# Altium PCB DFB.PcbDoc
Units mm, origin at the board's own origin, x right, y up, seen from the top; angles counter-clockwise.
Board outline 72.04 x 102.48 mm, 2 copper layers (Top Layer, Bottom Layer); 45 components, 51 nets, 237 pads, 4 vias.
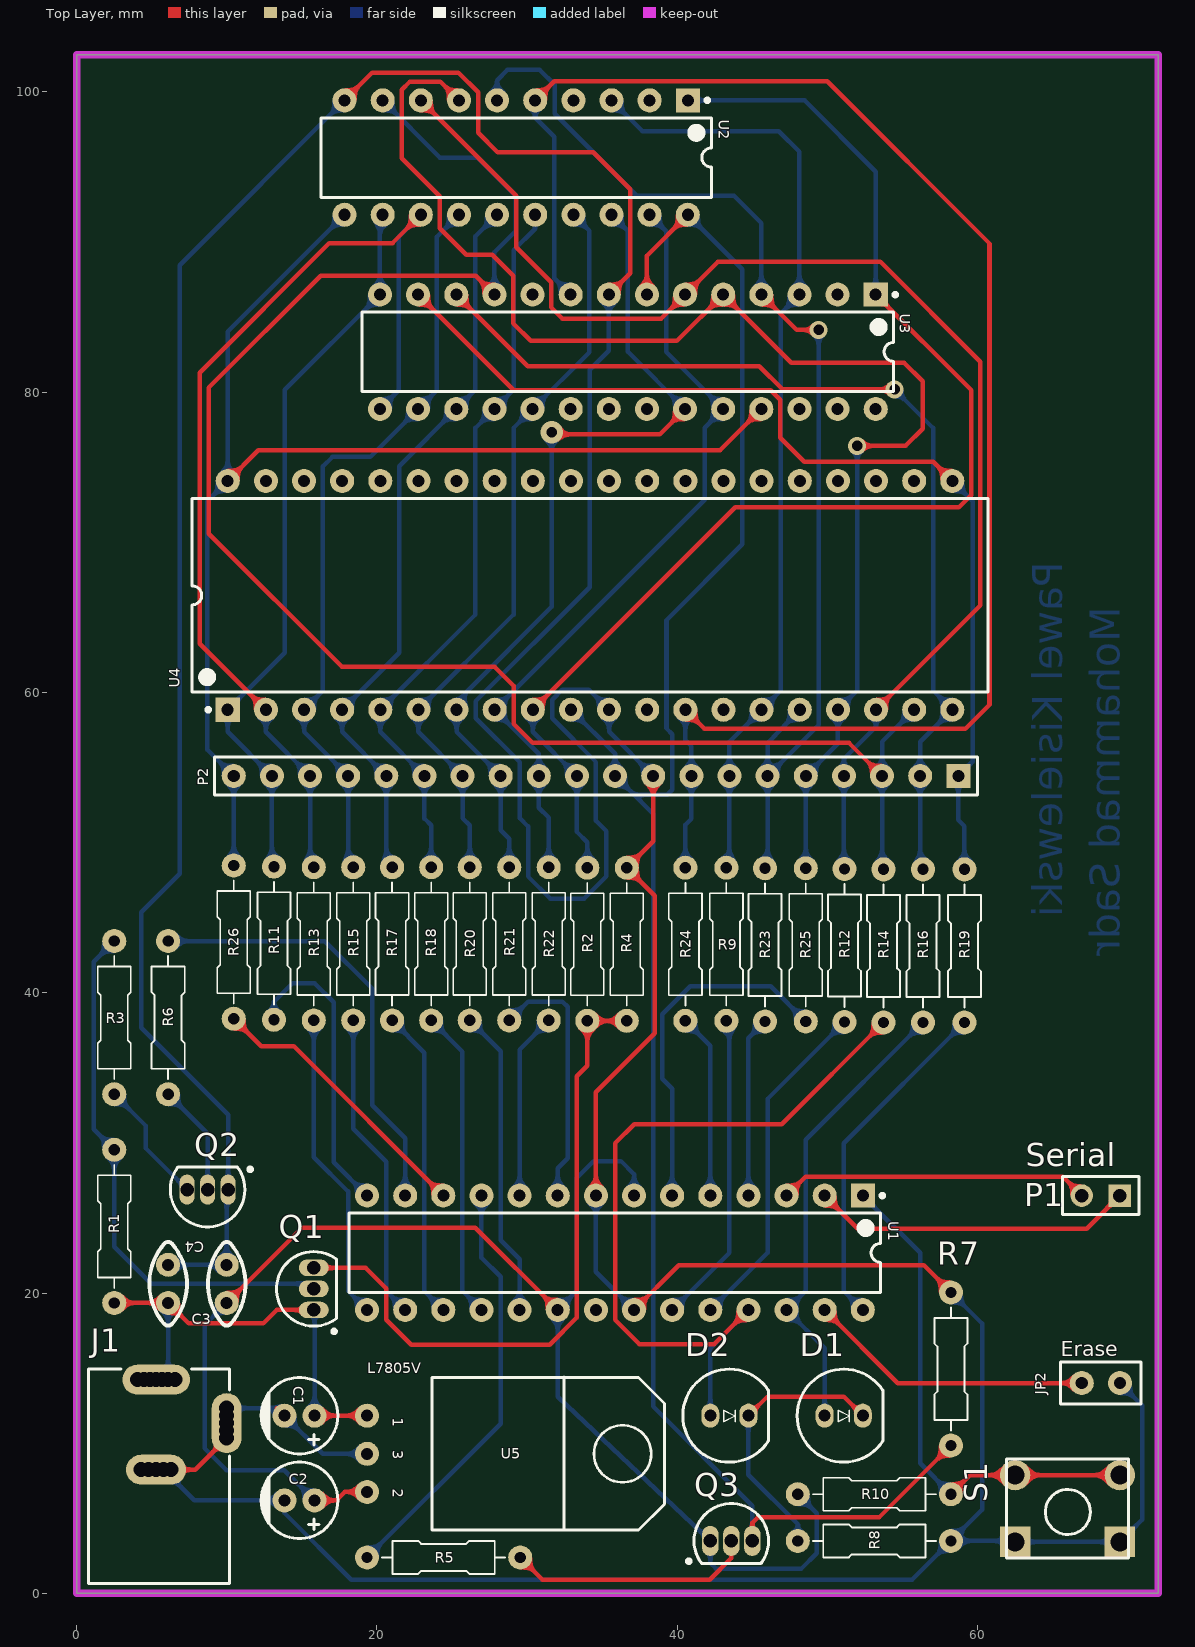
[diagram p0: Top Layer view]
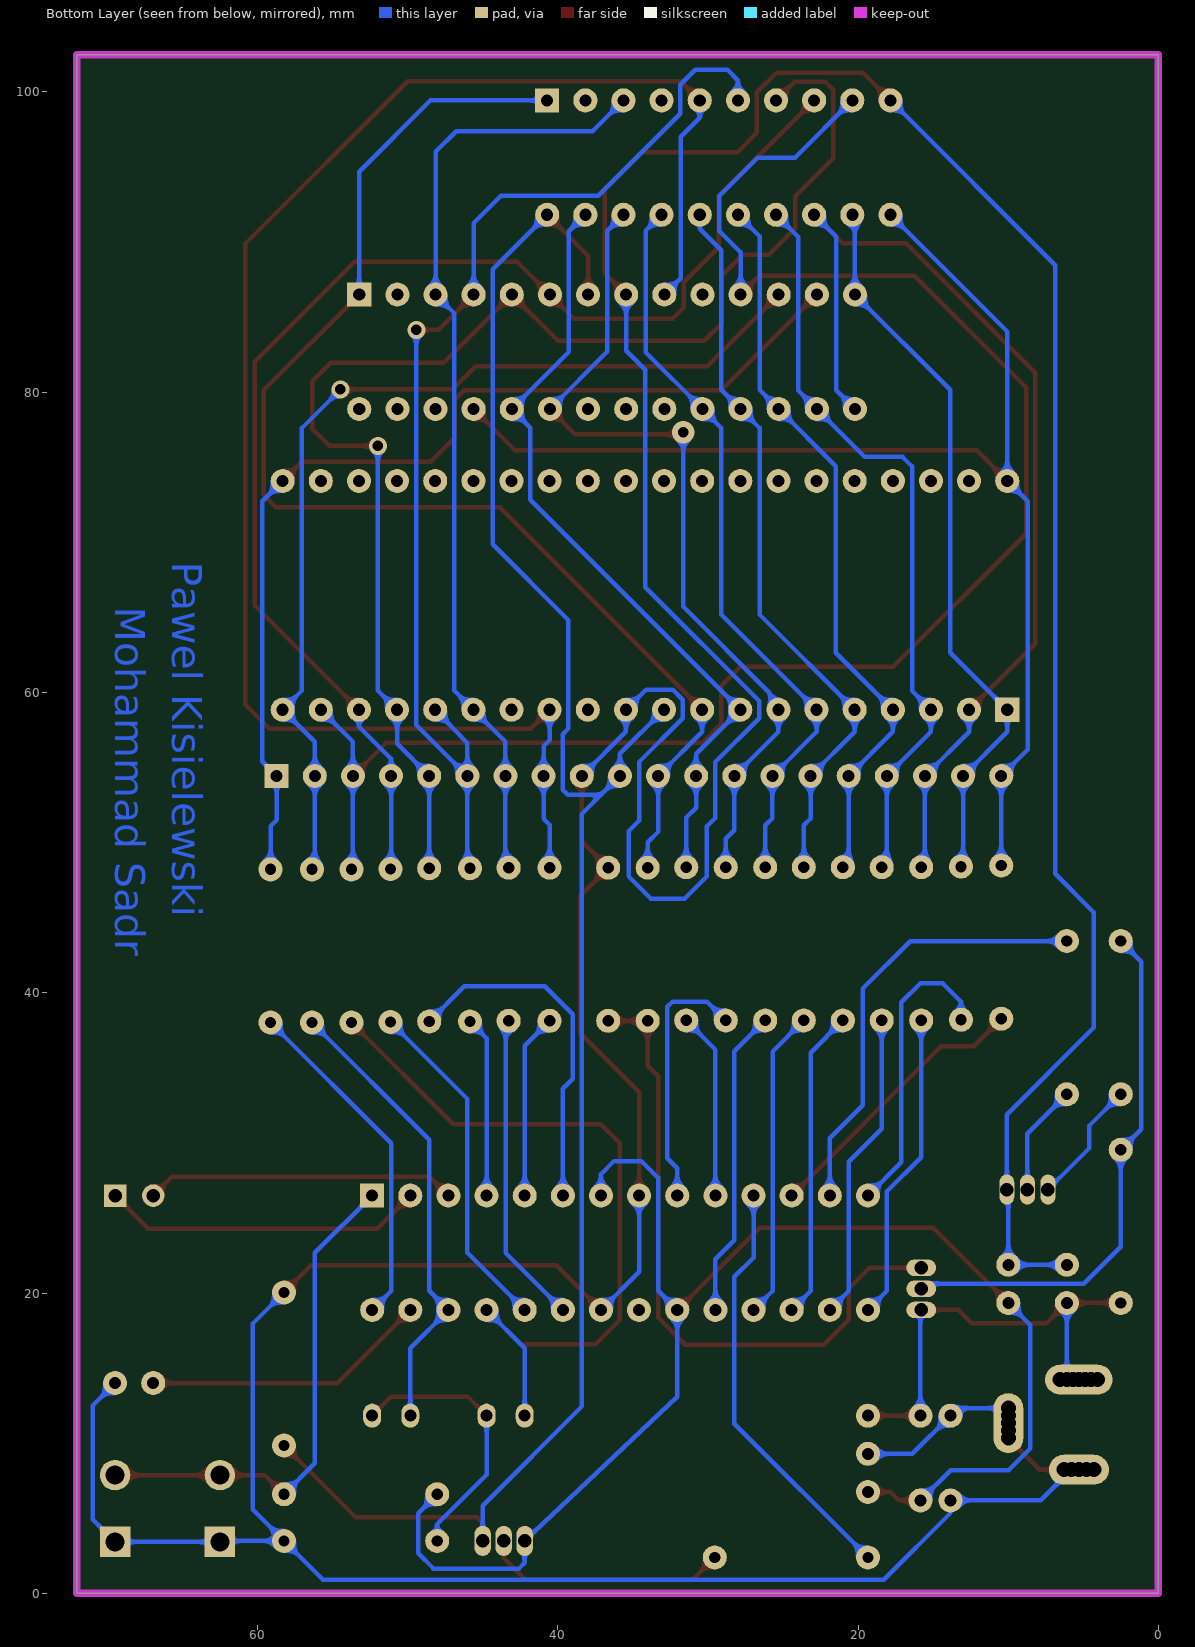
[diagram p1: Bottom Layer view, seen from below]
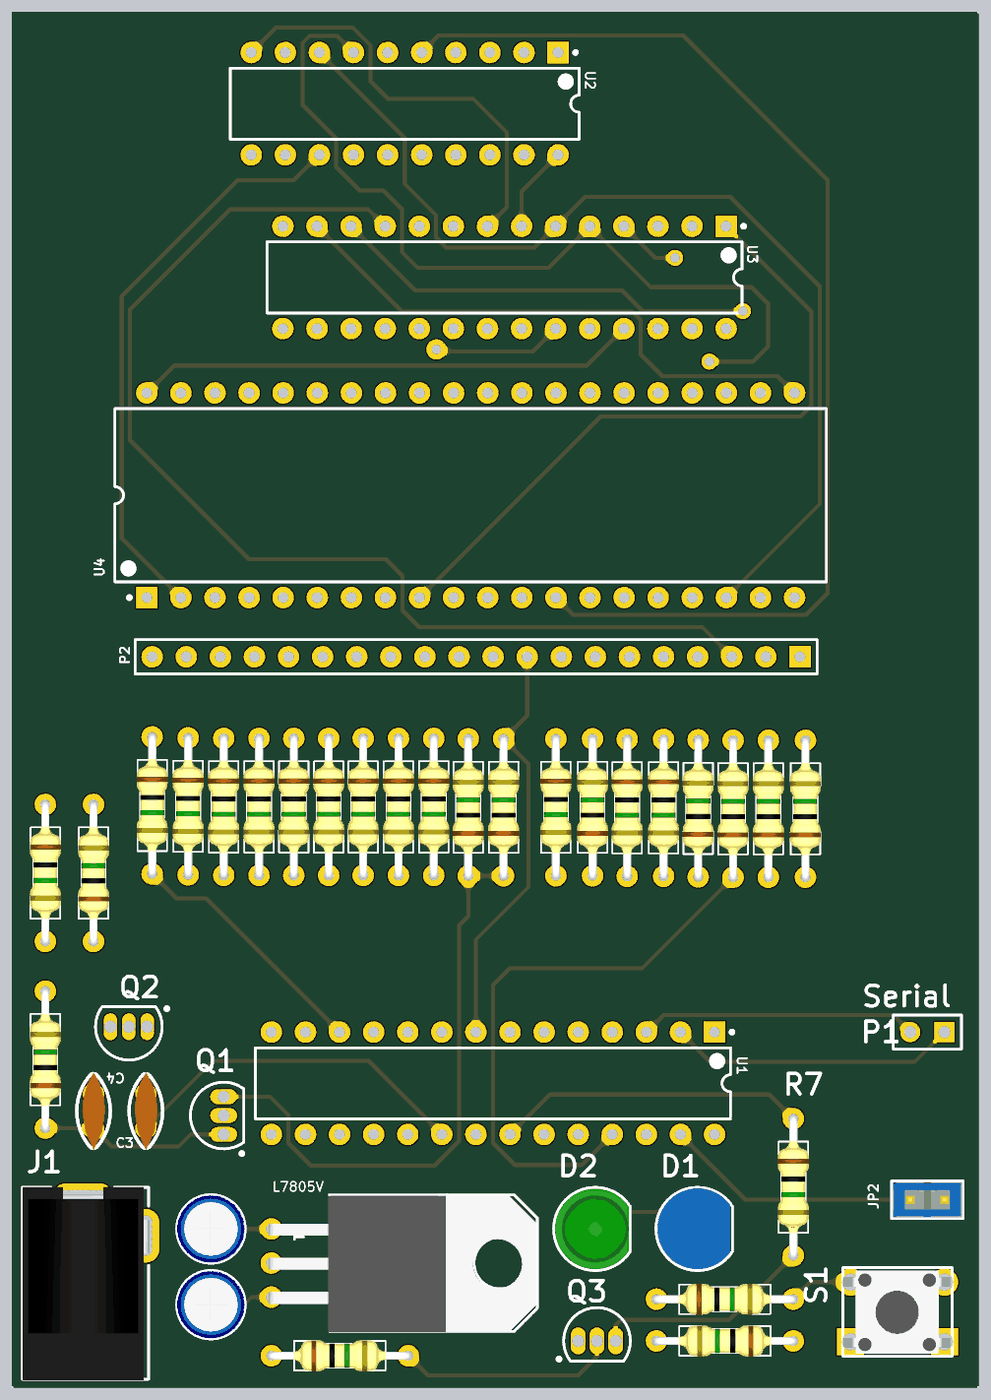
[diagram p2: 3D render of the assembled board from above, using the file's embedded part models]

## Layer stack, top to bottom
Top Solder: solder mask 0.0102, Solder Resist, Dk 3.5
Top Layer: signal copper 0.0356
Dielectric 1: dielectric 0.32, FR-4, Dk 4.8
Bottom Layer: signal copper 0.0356
Bottom Solder: solder mask 0.0102, Solder Resist, Dk 3.5

## Board outline
0,0 0,102.48 72.04,102.48 72.04,0

## Design rules (kind name [scope] priority, off if disabled: settings)
Clearance [All] p1: gap=0.3 ignorepadtopadclearanceinfootprint=FALSE
HoleSize [All] p1: absolutevalues=TRUE maxlimit=5 minlimit=0.2 maxpercent=80.000 minpercent=20.000
HoleToHoleClearance [All] p1: gap=0.3 allowstackedmicrovias=TRUE
MinimumSolderMaskSliver [All] p1: minsoldermaskwidth=0.3
PolygonConnect [All] p1: connectstyle=Relief reliefconductorwidth=0.254 reliefentries=4 polygonreliefangle="90 Angle" airgapwidth=0.254
RoutingCorners [All] p1: cornerstyle=Round minsetback=2.54 maxsetback=2.54
RoutingVias [All] p1: holewidth=0.7 width=1.2 viastyle="Through Hole" minholewidth=0.7 minwidth=1.5 maxholewidth=1 maxwidth=1.7
SilkToSilkClearance [All] p1: silktosilkclearance=0
SilkToSolderMaskClearance [IsPad] p1: minsilkscreentomaskgap=0 clearancetoexposedcopper=TRUE
SolderMaskExpansion [All] p1: expansion=0.102
Width [All] p1: maxlimit=0.4 minlimit=0.3 preferedwidth=0.3
24 further rules are at their usual default settings.

## Components (designator, comment, footprint, x,y, rotation, side; value= is the part's Value field where it differs from the comment)
C1 "100uF" "cap 01" 14.84,11.83 r0 top
C2 "10uF" "cap 01" 14.84,6.19 r0 top
C3 "100nF" "Cap - 100nF" 6.09,20.61 r90 top
C4 "10nF" "Cap - 100nF" 9.99,20.61 r90 top
D1 "LED 5MM" LED5MM_BLUE 51.09,11.83 r0 top
D2 "LED 5MM" LED5MM_GRN 43.47,11.83 r0 top
J1 "DC Power Jack" "DC Power Jack 1" 4.49,14.23 r90 top
JP2 "Erase" "Jumper Small - 2.54 - BLUE" 68.212,14 r0 top
P1 "Serial" HDR1X2 69.482,26.49 r180 top
P2 "Header 20" HDR1X20 58.72,54.44 r180 top
Q1 "BC557" TO-92A#1 15.79,20.278 r0 top
Q2 "BC547" TO-92A#2 8.72,26.89 r90 top
Q3 "BC557" TO-92A#3 43.6,3.49 r270 top
R1 "10K" "Axial 0_25 W, 0_4 IN LEAD PITCH" 2.5,24.44 r90 top
R2 "100" "Axial 0_25 W, 0_4 IN LEAD PITCH" 34.01,43.23 r90 top
R3 "1K" "Axial 0_25 W, 0_4 IN LEAD PITCH" 2.5,38.34 r270 top
R4 "1K" "Axial 0_25 W, 0_4 IN LEAD PITCH" 36.64,43.23 r90 top
R5 "4.7K" "Axial 0_25 W, 0_4 IN LEAD PITCH" 24.44,2.39 r0 top
R6 "4.7K" "Axial 0_25 W, 0_4 IN LEAD PITCH" 6.09,38.34 r90 top
R7 "100" "Axial 0_25 W, 0_4 IN LEAD PITCH" 58.23,14.94 r270 top
R8 "100" "Axial 0_25 W, 0_4 IN LEAD PITCH" 53.13,3.49 r180 top
R9 "1K" "Axial 0_25 W, 0_4 IN LEAD PITCH" 43.27,43.23 r90 top
R10 "10K" "Axial 0_25 W, 0_4 IN LEAD PITCH" 53.13,6.6 r0 top
R11 "1K" "Axial 0_25 W, 0_4 IN LEAD PITCH" 13.14,43.3 r270 top
R12 "1K" "Axial 0_25 W, 0_4 IN LEAD PITCH" 51.14,43.15 r90 top
R13 "1K" "Axial 0_25 W, 0_4 IN LEAD PITCH" 15.79,43.26 r270 top
R14 "1K" "Axial 0_25 W, 0_4 IN LEAD PITCH" 53.74,43.12 r90 top
R15 "1K" "Axial 0_25 W, 0_4 IN LEAD PITCH" 18.42,43.26 r270 top
R16 "1K" "Axial 0_25 W, 0_4 IN LEAD PITCH" 56.37,43.12 r90 top
R17 "1K" "Axial 0_25 W, 0_4 IN LEAD PITCH" 21.01,43.26 r270 top
R18 "1K" "Axial 0_25 W, 0_4 IN LEAD PITCH" 23.61,43.26 r270 top
R19 "1K" "Axial 0_25 W, 0_4 IN LEAD PITCH" 59.13,43.12 r90 top
R20 "1K" "Axial 0_25 W, 0_4 IN LEAD PITCH" 26.18,43.26 r270 top
R21 "1K" "Axial 0_25 W, 0_4 IN LEAD PITCH" 28.81,43.26 r270 top
R22 "1K" "Axial 0_25 W, 0_4 IN LEAD PITCH" 31.44,43.26 r270 top
R23 "1K" "Axial 0_25 W, 0_4 IN LEAD PITCH" 45.85,43.19 r270 top
R24 "1K" "Axial 0_25 W, 0_4 IN LEAD PITCH" 40.54,43.23 r270 top
R25 "1K" "Axial 0_25 W, 0_4 IN LEAD PITCH" 48.56,43.19 r270 top
R26 "1K" "Axial 0_25 W, 0_4 IN LEAD PITCH" 10.46,43.37 r270 top
S1 "Switch PB" "Switch - Push to On" 65.99,5.65 r180 top
U1 "ATmega8A-PU" 28P3 35.85,22.68 r270 top
U2 "20 Pins / AT90S2313/Tiny2313" 20P3 29.271,95.63 r270 top
U3 "28 Pins /Mega8/88/168..." 28P3 36.711,82.69 r270 top
U4 "40 Pins / Mega16/32/644/128..." 40P6 34.19,66.47 r90 top
U5 "L7805V" "78XXCV - Right" 19.34,9.29 r270 top

## Footprints (in the part's own frame and the unit in brackets; to place one, negate y for a bottom-side part, rotate by r counter-clockwise, add the part's x,y. Pads: shape width x height; smd on the part's side, far side on the other; paste and mask are expansions set on the pad)
20P3 [mm] "DIP, 20-Pin, Row Spacing 7.62 mm, Pitch 2.54 mm"
  rect 1.6x1.6 hole 0.8: 1(-3.81,11.43)
  round 1.6 hole 0.8: 2(-3.81,8.89) 3(-3.81,6.35) 4(-3.81,3.81) 5(-3.81,1.27) 6(-3.81,-1.27) 7(-3.81,-3.81) 8(-3.81,-6.35) 9(-3.81,-8.89) 10(-3.81,-11.43) 11(3.81,-11.43) 12(3.81,-8.89) 13(3.81,-6.35) 14(3.81,-3.81) 15(3.81,-1.27) 16(3.81,1.27) 17(3.81,3.81) 18(3.81,6.35) 19(3.81,8.89) 20(3.81,11.43)
  silkscreen extent -3.93,-13 2.65,13, body extent -3.6,-12.95 3.6,12.95, height 5.34
28P3 [mm] "DIP, 28-Leads, Row Spacing 7.62mm, Pitch 2.54mm, Body 34.67x7.3mm"
  rect 1.6x1.6 hole 0.8: 1(-3.81,16.51)
  round 1.6 hole 0.8: 2(-3.81,13.97) 3(-3.81,11.43) 4(-3.81,8.89) 5(-3.81,6.35) 6(-3.81,3.81) 7(-3.81,1.27) 8(-3.81,-1.27) 9(-3.81,-3.81) 10(-3.81,-6.35) 11(-3.81,-8.89) 12(-3.81,-11.43) 13(-3.81,-13.97) 14(-3.81,-16.51) 15(3.81,-16.51) 16(3.81,-13.97) 17(3.81,-11.43) 18(3.81,-8.89) 19(3.81,-6.35) 20(3.81,-3.81) 21(3.81,-1.27) 22(3.81,1.27) 23(3.81,3.81) 24(3.81,6.35) 25(3.81,8.89) 26(3.81,11.43) 27(3.81,13.97) 28(3.81,16.51)
  silkscreen extent -3.93,-17.7 2.65,17.94, body extent -3.6,-17.65 3.6,17.65, height 4.58
40P6 [mm] "40-Pin Ceramic Dual In-Line Package (CerDIP)"
  rect 1.6x1.6 hole 0.8: 1(-7.62,24.13)
  round 1.6 hole 0.8: 2(-7.62,21.59) 3(-7.62,19.05) 4(-7.62,16.51) 5(-7.62,13.97) 6(-7.62,11.43) 7(-7.62,8.89) 8(-7.62,6.35) 9(-7.62,3.81) 10(-7.62,1.27) 11(-7.62,-1.27) 12(-7.62,-3.81) 13(-7.62,-6.35) 14(-7.62,-8.89) 15(-7.62,-11.43) 16(-7.62,-13.97) 17(-7.62,-16.51) 18(-7.62,-19.05) 19(-7.62,-21.59) 20(-7.62,-24.13) 21(7.62,-24.13) 22(7.62,-21.59) 23(7.62,-19.05) 24(7.62,-16.51) 25(7.62,-13.97) 26(7.62,-11.43) 27(7.62,-8.89) 28(7.62,-6.35) 29(7.62,-3.81) 30(7.62,-1.27) 31(7.62,1.27) 32(7.62,3.81) 33(7.62,6.35) 34(7.62,8.89) 35(7.62,11.43) 36(7.62,13.97) 37(7.62,16.51) 38(7.62,19.05) 39(7.62,21.59) 40(7.62,24.13)
  silkscreen extent -7.74,-26.5 6.45,26.5, body extent -7.05,-26.47 7.05,26.47, height 4.83
"78XXCV - Right" [mm] "Right Angle"
  round 1.6 hole 0.8: 1(-2.54,0) 2(2.54,0) 3(0,0)
  silkscreen extent -5.11,4.32 5.08,19.81, body extent -5.03,-0.2 5.13,19.71, height 4.44
"Axial 0_25 W, 0_4 IN LEAD PITCH" [mm] "Designer Abbas Basereh"
  round 1.6 hole 0.75: 1(5.1,0) 2(-5.1,0)
  silkscreen extent -4.1,-1.1 4.1,1.1, body extent -5.4,-1.16 5.36,1.16, height 3.63
"cap 01" [mm]
  round 1.6 hole 0.8: 1(1,0) 2(-1,0)
  silkscreen extent -2.55,-2.55 2.55,2.55, body extent -2.53,-2.53 2.53,2.53, height 12.54
"Cap - 100nF" [mm]
  round 1.6 hole 0.8: 1(-1.27,0) 2(1.27,0)
  silkscreen extent -2.78,-1.25 2.79,1.25, body extent -2.92,-0.86 2.92,0.83, height 6.92
"DC Power Jack 1" [mm] "Power Adaptor Jack"
  round 1.5 hole 1: 1(0,0.45) 1(0,0) 1(0,-0.4) 1(0,-1.2) 1(0,-1.6) 1(0,-2.05) 2(-6,-1.8) 2(-6,-1.3) 2(-6,-0.3) 2(-6,0.2) 3(-3.9,-5.5) 3(-3.4,-5.5) 3(-2.4,-5.5) 3(-1.9,-5.5)
  oval 2x4.5 hole 1: 1(0,-0.8)
  oval 2x4 hole 1: 2(-6,-0.8)
  oval 4x2 hole 1: 3(-2.9,-5.5)
  silkscreen extent -13.59,-5.7 0.7,3.7, body extent -13.68,-5.74 0.72,3.66, height 11.05
HDR1X2 [mm] "Connector; Header; 2 Position"
  rect 1.5x1.5 hole 0.9: 1(0,0)
  round 1.5 hole 0.9: 2(2.54,0)
  silkscreen extent -1.27,-1.27 3.81,1.27
HDR1X20 [mm] "Connector; Header; 20 Position"
  rect 1.6x1.6 hole 0.8: 1(0,0)
  round 1.6 hole 0.8: 2(2.54,0) 3(5.08,0) 4(7.62,0) 5(10.16,0) 6(12.7,0) 7(15.24,0) 8(17.78,0) 9(20.32,0) 10(22.86,0) 11(25.4,0) 12(27.94,0) 13(30.48,0) 14(33.02,0) 15(35.56,0) 16(38.1,0) 17(40.64,0) 18(43.18,0) 19(45.72,0) 20(48.26,0)
  silkscreen extent -1.27,-1.27 49.53,1.27
"Jumper Small - 2.54 - BLUE" [mm]
  round 1.6 hole 0.8: 1(-1.27,0) 2(1.27,0)
  silkscreen extent -2.67,-1.4 2.67,1.4, body extent -2.54,-1.27 2.54,1.27, height 8.57
LED5MM_BLUE [mm] "LED 5MM THROUGH HOLE BLUE-Designer Abbas Basereh"
  oval 1.2x1.6 hole 0.8: 1(-1.27,0) 2(1.27,0)
  silkscreen extent -3.1,-3.1 2.6,3.1, body extent -2.99,-2.98 2.43,3.04, height 12.31
LED5MM_GRN [mm] "LED 5MM THROUGH HOLE GREEN-Designer Abbas Basereh"
  oval 1.2x1.6 hole 0.8: 1(-1.27,0) 2(1.27,0)
  silkscreen extent -3.1,-3.1 2.6,3.1, body extent -3,-3 2.5,3, height 9.14
"Switch - Push to On" [mil]
  rect 80x80 hole 50: 1(-137.5,87.5) 1(137.5,87.5)
  round 80 hole 50: 2(-137.5,-87.5) 2(137.5,-87.5)
  silkscreen extent -160,-130 160,130, body extent -155,-121 157,123, height 205
TO-92A#1 [mm] "TO, Flat Index; 3 In-Line, Axial Leads; Body Dia. 4.5mm; Leads 0.51 x 0.48 mm (max)"
  oval 2x1.1 hole 0.9: 1(0,-1.408) 2(0,0) 3(0,1.402)
  silkscreen extent -2.48,-2.95 1.5,2.48, body extent -2.48,-2.5 1.5,2.5, height 6.86
TO-92A#2 [mm] "TO, Flat Index; 3 In-Line, Axial Leads; Body Dia. 4.5mm; Leads 0.51 x 0.48 mm (max)"
  oval 2x1 hole 0.9: 1(0,-1.37) 2(0,0) 3(0,1.37)
  silkscreen extent -2.48,-2.96 1.5,2.48, body extent -2.48,-2.5 1.5,2.5, height 6.86
TO-92A#3 [mm] "TO, Flat Index; 3 In-Line, Axial Leads; Body Dia. 4.5mm; Leads 0.51 x 0.48 mm (max)"
  oval 2x1.1 hole 0.9: 1(0,-1.4) 2(0,0) 3(0,1.4)
  silkscreen extent -2.48,-2.95 1.5,2.48, body extent -2.48,-2.5 1.5,2.5, height 6.86

## Part data
C1 C2: library part Cap-Polar, "Polar Capacitor", Voltage=16V, Adding Date=1387/12/20, Designer="Saeid Jorablo", Organazation=ControTec
C3 C4: library part Cap-Bipolar, "Bipolar Capacitor", Voltage=100V, Adding Date=1387/12/20, Designer="Saeid Jorablo", Organazation=ControTec
D1 D2: "Light Emitting Diode", Data=16-12-2016, Designer="Abbas Basereh"
J1: "DC Power Jack. Center Pin 2.5mm. Diameter: 5.7mm", Adding Date=10/21/2009, Company=Personal, Designer="Ali Hafizi", Project Name=Laser
JP2: library part Jumper, "Jumper", Company=E.P.I.L, Defualt State=Close, Design Date=2011/11/02
P1: library part "Header 2", "Header, 2-Pin", LatestRevisionDate=17-Jul-2002, LatestRevisionNote="Re-released for DXP Platform.", Publisher="Altium Limited"
P2: "Header, 20-Pin", LatestRevisionDate=17-Jul-2002, LatestRevisionNote="Re-released for DXP Platform.", Publisher="Altium Limited"
Q1 Q3: library part 2N3906, "PNP General Purpose Amplifier", ComponentLink1Description="Manufacturer Link", ComponentLink1URL=http://www.fairchildsemi.com/, ComponentLink2Description=Datasheet, ComponentLink2URL=http://www.fairchildsemi.com/ds/2N%2F2N3906.pdf, DatasheetVersion=1997, LatestRevisionDate=15-Jan-2003, LatestRevisionNote="PCB Footprint 'BCY-W3/D4.7' replaced", PackageDescription="TO, Flat Index; 3 In-Line, Axial Leads; Body Dia. 4.5mm; Leads 0.51 x 0.48 mm (max)", PackageReference=TO-92A, PackageVersion=Sep-1998, Published=8-Jun-2000, Publisher="Altium Limited"
Q2: library part 2N3904, "NPN General Purpose Amplifier", ComponentLink1Description="Manufacturer Link", ComponentLink1URL=http://www.fairchildsemi.com/, ComponentLink2Description=Datasheet, ComponentLink2URL=http://www.fairchildsemi.com/ds/2N%2F2N3904.pdf, DatasheetVersion=1997, LatestRevisionDate=15-Jan-2003, LatestRevisionNote="PCB Footprint 'BCY-W3/D4.7' replaced", PackageDescription="TO, Flat Index; 3 In-Line, Axial Leads; Body Dia. 4.5mm; Leads 0.51 x 0.48 mm (max)", PackageReference=TO-92A, PackageVersion=Sep-1998, Published=8-Jun-2000, Publisher="Altium Limited"
R1 R2 R3 R4 R5 R6 R7 R8 R9 R10 R11 R12 R13 R14 R15 R16 R17 R18 R19 R20 R21 R22 R23 R24 R25 R26: library part "RES Axial 0.25W", "RES Axial 0.25W", Data=4-1-2017, Desc.="RES Axial 0.25W", Designer="Abbas Basereh"
S1: "Push Button Switch"
U1: "8-bit AVR Microcontroller, 8KB Flash, 512 Bytes EEPROM, 1KB SRAM, 28-pin PDIP, Industrial Grade (-40°C to 85°C)", Supplier Part Number 1=ATMEGA8A-PU-ND, ComponentLink1Description="Manufacturer Link", ComponentLink1URL=http://www.atmel.com/products/avr/default.asp?, ComponentLink2Description="ATmega8A Datasheet", ComponentLink2URL=http://www.atmel.com/dyn/resources/prod_documents/doc8159.pdf, ComponentLink3Description="ATmega8A Summary", ComponentLink3URL=http://www.atmel.com/dyn/resources/prod_documents/8159S.pdf, ComponentLink4Description="Atmel.com Home", ComponentLink4URL=http://www.atmel.com, DatasheetVersion="revC, Jul-2009", PackageDescription="28-lead (0.300\"/7.62mm Wide) Plastic Dual Inline Package (PDIP)", PackageReference=28P3, PackageVersion="revB, Sep-2001", Published=1-Apr-2010, Publisher="Altium Limited", Supplier 1=Digi-Key, Supplier 2=Farnell, Supplier 3=Mouser, Supplier Part Number 2=1748534, Supplier Part Number 3=556-ATMEGA8A-PU
U2: library part ATtiny2313-20PI, "Low Power tinyAVR® 8-Bit Microcontroller, 2K Flash Memory, 20MHz, Industrial Temperature, 20-Lead PDIP", Code_JEDEC=MS-001-AD, ComponentLink1Description="Manufacturer URL", ComponentLink1URL=http://www.atmel.com/, DatasheetVersion="DOC2543B, Mar-2009", PackageDescription="20-lead (0.300\"/7.62mm Wide) Plastic Dual Inline Package (PDIP)", PackageReference=20P3, PackageVersion="revD, Oct-2010"
U3: library part ATmega8A-PU, "8-bit AVR Microcontroller, 2.7-5.5V, 16MHz, 8KB Flash, 512 Bytes EEPROM, 1KB SRAM, 28-pin PDIP, Industrial Grade (-40°C to 85°C)", ComponentLink1Description="Manufacturer URL", ComponentLink1URL=http://www.atmel.com/, ComponentLink2Description="ATmega8A Datasheet", ComponentLink2URL=http://www.atmel.com/dyn/resources/prod_documents/doc8159.pdf, ComponentLink3Description="ATmega8A Summary", ComponentLink3URL=http://www.atmel.com/dyn/resources/prod_documents/8159S.pdf, DatasheetVersion="revD, Feb-2011", PackageDescription="28-lead (0.300\"/7.62mm Wide) Plastic Dual Inline Package (PDIP)", PackageReference=28P3, PackageVersion="revB, Sep-2001"
U4: library part ATmega32A-PU, "8-bit AVR Microcontroller, 2.7-5.5V, 16MHz, 32KB Flash, 1KB EEPROM, 2KB SRAM, 40-pin PDIP, Industrial Grade (-40°C to 85°C)", Code_JEDEC=MS-011-AC, ComponentLink1Description="Manufacturer URL", ComponentLink1URL=http://www.atmel.com/, ComponentLink2Description="ATmega32A Datasheet", ComponentLink2URL=http://www.atmel.com/dyn/resources/prod_documents/doc8155.pdf, ComponentLink3Description="ATmega32A Summary", ComponentLink3URL=http://www.atmel.com/dyn/resources/prod_documents/8155S.pdf, DatasheetVersion="revC, Feb-2011", PackageDescription="40-lead (0.600\"/15.24mm Wide) Plastic Dual Inline Package (PDIP)", PackageReference=40P6, PackageVersion="revB, Sep-2001"
U5: library part L78XXCV, "Fixed Voltage Regulator", Adding Date=1387/01/06, Company=ControTec, Designer="Saeid Jorablo"

## Via types
v1: diameter 1.2, hole 0.7, Top Layer to Bottom Layer, 3 vias
v2: diameter 1.5, hole 0.7, Top Layer to Bottom Layer, 1 vias

## Nets (pads, with @x,y where several pads share a name; then routed paths per layer and width w, separated by ;. In a path a pad name is that pad's centre, name@x,y a point inside that pad or via, vN(x,y) a via of type N, cw(c..) or ccw(c..) an arc to the next point about the centre after c; other vN are vias at no path point)
5VCC: P2.10 Q3.3 R7.1 U2.20 U3.7 U4.10 | length 128.1
  Top Layer w0.3: U3.7 37.981,89.1 U2.20 ; Q3.3 45,4.683 45.367,5.051 53.441,5.051 R7.1
  Bottom Layer w0.3: U4.10 35.86,55.91 P2.10 37.116,53.184 ; U2.20 44.339,88.182 44.339,69.871 39.284,64.817 39.284,57.603 39.665,57.222 39.665,53.514 39.335,53.184 37.116,53.184 ; Q3.3 45,5.838 38.395,12.443 38.395,51.905 37.116,53.184
12VCC: P2.11 R2.1 U2.1 U3.1 U4.9 | length 85.8
  Top Layer w0.3: U4.9 43.865,72.335 58.766,72.335 59.579,73.148 59.579,80.142 U3.1
  Bottom Layer w0.3: U4.9 30.38,57.38 P2.11 33.32,50.71 34.01,50.02 R2.1 ; U2.1 48.476,99.44 53.221,94.695 U3.1
+5: C2.1 C4.1 Q3.1 R10.2 U1.7 U1.20 U5.2 | length 97.9
  Top Layer w0.3: C4.1 15.005,24.355 26.555,24.355 U1.20 ; C2.1 17.288,6.19 17.848,6.75 U5.2
  Bottom Layer w0.3: C4.1 8.525,17.875 8.525,9.648 9.973,8.2 13.83,8.2 C2.1 ; U1.7 37.12,27.92 36.25,28.79 34.44,28.79 33.315,27.665 33.315,20.145 U1.20 32.04,13.082 Q3.1 42.2,2.028 42.581,1.647 48.276,1.647 49.292,2.663 49.292,5.338 R10.2
+12: C1.1 C3.1 J1.1 Q1.1 R1.2 U5.1 | length 31.9
  Top Layer w0.3: R1.2 C3.1 7.451,17.979 12.436,17.979 13.327,18.87 Q1.1 ; J1.1@4.89,14.23 5.29,14.23 5.69,14.23 J1.1@6.09,14.23 ; C1.1 U5.1
  Bottom Layer w0.3: J1.1@5.29,14.23 5.69,14.23 6.09,14.23 C3.1 ; Q1.1 15.84,18.82 C1.1
BS1: P2.4 R12.1 U2.8 U3.6 U4.18 | length 88.2
  Top Layer w0.3: U2.8 29.277,93.084 29.277,89.658 31.613,87.321 31.613,85.645 32.35,84.908 38.929,84.908 U3.6 42.711,88.69 53.536,88.69 60.188,82.038 60.188,65.798 U4.18
  Bottom Layer w0.3: R12.1 51.1,48.29 P2.4 51.1,55.571 53.24,57.711 U4.18
BS2: P2.20 R26.2 U2.11 U3.25 U4.40 | length 85.4
  Top Layer w0.3: U4.40 12.1,76.13 31.141,76.13 31.142,76.129 42.85,76.129 U3.25
  Bottom Layer w0.3: R26.2 P2.20 8.703,56.197 8.703,72.733 U4.40 10.06,84.039 U2.11
DATA0: P2.19 R11.2 U2.12 U3.14 U4.1 | length 49
  Bottom Layer w0.3: R11.2 13,48.54 P2.19 10.06,57.38 U4.1 13.859,62.649 13.859,80.158 U3.14 20.201,91.64 U2.12
DATA1: P2.18 R13.2 U2.13 U3.15 U4.2 | length 69.2
  Top Layer w0.3: U4.2 8.195,63.255 8.195,81.301 16.831,89.937 21.038,89.937 U2.13
  Bottom Layer w0.3: U4.2 12.6,57.38 P2.18 15.54,48.61 R13.2 ; U3.15 21.453,80.132 21.453,90.352 U2.13
DATA2: P2.17 R15.2 U2.14 U3.16 U4.3 | length 50.6
  Bottom Layer w0.3: R15.2 18.08,48.7 P2.17 15.14,57.38 U4.3 16.399,60.109 16.399,75.053 17.034,75.688 19.549,75.688 U3.16 23.993,80.132 23.993,90.352 U2.14
DATA3: P2.16 R17.2 U2.15 U3.17 U4.4 | length 49.1
  Bottom Layer w0.3: R17.2 20.62,48.75 P2.16 17.68,57.38 U4.4 21.479,62.649 21.479,75.078 U3.17 26.559,80.158 26.559,90.378 U2.15
DATA4: P2.15 R18.2 U2.16 U3.18 U4.5 | length 49.1
  Bottom Layer w0.3: R18.2 23.61,51.152 23.16,51.602 P2.15 20.22,57.38 U4.5 26.559,65.189 26.559,77.618 U3.18 29.099,80.158 29.099,89.447 30.541,90.889 U2.16
DATA5: P2.14 R20.2 U2.17 U3.19 U4.6 | length 50
  Bottom Layer w0.3: R20.2 26.18,51.152 25.7,51.632 P2.14 22.76,57.38 U4.6 29.099,65.189 29.099,77.618 U3.19 34.153,82.672 34.153,90.748 U2.17
DATA6: P2.13 R21.2 U2.18 U3.23 U4.7 | length 57.4
  Top Layer w0.3: v2(31.639,77.329) 31.674,77.329 31.817,77.187 38.828,77.187 U3.23
  Bottom Layer w0.3: R21.2 28.81,50.26 28.24,50.83 P2.13 25.3,57.38 U4.7 25.971,60.055 31.639,65.723 v2@31.639,77.009 ; v2(31.639,77.329) v2@31.77,77.46 ; U2.18 36.693,90.748 36.693,82.708 U3.23
DATA7: P2.12 R22.2 U2.19 U3.24 U4.8 | length 53.3
  Bottom Layer w0.3: R22.2 31.44,51.67 30.78,52.33 P2.12 30.78,55.91 U4.8 41.824,72.834 41.824,77.643 U3.24 39.259,82.682 39.259,90.722 U2.19
ERASE: JP2.1 U1.27 | length 19.1
  Top Layer w0.3: U1.27 54.69,14 JP2.1
GND: C1.2 C2.2 C3.2 C4.2 J1.2 J1.3 JP2.2 P2.9 Q2.1 R4.1 R7.2 R8.2 S1.1 U1.8 U1.22 U2.10 U3.8 U4.11 U5.3 | length 373.6
  Top Layer w0.3: J1.2@5.29,8.23 5.79,8.23 6.29,8.23 7.89,8.23 J1.3@9.99,10.33 ; C1.2@13.34,12.33 C1.2 ; U2.10 19.691,101.29 25.417,101.29 26.737,99.97 26.737,97.278 28.032,95.983 34.396,95.983 36.871,93.508 36.871,87.93 U3.8 ; U1.8 34.58,33.38 38.5,37.3 38.5,46.47 R4.1 38.4,50.09 P2.9 ; U1.22 40.09,21.84 56.43,21.84 R7.2
  Bottom Layer w0.3: J1.2@5.79,8.23 7.83,6.19 C2.2 13.84,5.35 18.29,0.9 55.64,0.9 R8.2 ; C3.2 C4.2 9.99,26.79 Q2.1 10.09,31.88 4.31,37.66 4.31,45.36 6.866,47.916 6.866,88.464 U2.10 ; J1.3@9.99,12.33 13.34,12.33 C1.2 16.38,9.29 U5.3 ; U1.8 34.58,21.41 U1.22 ; U3.8 35.441,82.767 34.17,81.496 34.17,67.018 26.584,59.432 26.584,58.286 29.505,55.365 29.505,51.634 30.064,51.075 30.064,47.748 31.537,46.275 33.798,46.275 35.271,47.748 35.271,50.771 34.585,51.456 34.585,55.368 31.67,58.283 31.67,59.518 32.35,60.198 34.112,60.198 U4.11 35.46,57.38 P2.9 ; R7.2 60.3,17.97 60.3,5.56 R8.2 ; JP2.2 70.958,12.524 70.958,4.903 69.483,3.427 62.498,3.427 62.435,3.49 R8.2
L1: D1.1 R16.2 U1.26 | length 31
  Bottom Layer w0.3: D1.1 49.82,16.33 U1.26 48.555,20.145 48.555,30.205 R16.2
L2: D2.1 R14.2 U1.25 | length 51.6
  Top Layer w0.3: U1.25 42.47,16.6 37.476,16.6 35.855,18.22 35.855,29.968 37.125,31.238 46.958,31.238 R14.2
  Bottom Layer w0.3: D2.1 42.2,16.33 U1.25
NetD1_2: D1.2 D2.2 R8.1 | length 18.4
  Top Layer w0.3: D2.2 46.012,13.102 51.088,13.102 D1.2
  Bottom Layer w0.3: D2.2 44.74,7.901 48.03,4.611 R8.1
NetQ1_2: Q1.2 R1.1 R3.2 | length 35.9
  Bottom Layer w0.3: R3.2 1.133,42.073 1.133,30.907 R1.1 2.5,23.09 4.969,20.621 14.989,20.621 Q1.2
NetQ1_3: Q1.3 R2.2 R4.2 | length 44.3
  Top Layer w0.3: Q1.3 19.24,21.68 20.615,20.305 20.615,18.22 22.286,16.55 31.5,16.55 33.315,18.365 33.315,34.435 34.01,35.13 R2.2 R4.2
NetQ2_2: Q2.2 R6.2 | length 7.4
  Bottom Layer w0.3: R6.2 8.72,30.61 Q2.2
NetQ2_3: Q2.3 R3.1 | length 8.4
  Bottom Layer w0.3: R3.1 4.613,31.127 4.613,29.627 Q2.3
NetQ3_2: Q3.2 R5.1 | length 16.4
  Top Layer w0.3: R5.1 31.02,0.91 42.165,0.91 43.6,2.345 Q3.2
NetR5_2: R5.2 U1.11 | length 28.3
  Bottom Layer w0.3: R5.2 28.235,11.285 28.235,21.078 26.96,22.353 U1.11
NetR6_1: R6.1 U1.13 | length 29.6
  Bottom Layer w0.3: R6.1 16.516,43.44 19.675,40.28 19.675,32.508 21.88,30.303 U1.13
NetR9_2: R9.2 U1.23 | length 21
  Bottom Layer w0.3: U1.23 43.475,22.685 43.475,37.867 43.27,37.867 R9.2
NetR10_1: R10.1 S1.2 U1.1 | length 34.1
  Top Layer w0.3: R10.1 59.503,7.872 62.498,7.872 S1.2@69.483,7.872
  Bottom Layer w0.3: U1.1 56.175,22.675 56.175,8.655 R10.1
NetR11_1: R11.1 U1.14 | length 20
  Bottom Layer w0.3: R11.1 13.14,39.41 14.37,40.64 15.84,40.64 17.11,39.37 17.11,28.72 U1.14
NetR12_2: R12.2 U1.24 | length 22.9
  Bottom Layer w0.3: U1.24 46.015,22.685 46.015,32.925 R12.2
NetR13_1: R13.1 U1.15 | length 20.8
  Bottom Layer w0.3: R13.1 15.79,29.053 18.075,26.768 18.075,20.135 U1.15
NetR15_1: R15.1 U1.16 | length 20.7
  Bottom Layer w0.3: R15.1 18.42,30.944 20.615,28.749 20.615,20.135 U1.16
NetR17_1: R17.1 U1.17 | length 20.7
  Bottom Layer w0.3: R17.1 23.155,36.015 23.155,20.135 U1.17
NetR18_1: R18.1 U1.18 | length 20.7
  Bottom Layer w0.3: R18.1 25.695,36.075 25.695,20.135 U1.18
NetR19_2: R19.2 U1.28 | length 23
  Bottom Layer w0.3: U1.28 51.095,20.135 51.095,29.985 R19.2
NetR20_1: R20.1 U1.19 | length 20.7
  Bottom Layer w0.3: R20.1 28.235,36.105 28.235,23.509 29.5,22.245 U1.19
NetR21_1: R21.1 U1.9 | length 17.4
  Bottom Layer w0.3: R21.1 30.067,39.417 32.35,39.417 32.706,39.061 32.706,28.986 32.04,28.32 U1.9
NetR22_1: R22.1 U1.10 | length 12.5
  Bottom Layer w0.3: U1.10 29.5,36.22 R22.1
NetR23_1: R23.1 U1.4 | length 12.1
  Bottom Layer w0.3: U1.4 44.74,36.98 R23.1
NetR24_1: R24.1 U1.5 | length 12.3
  Bottom Layer w0.3: R24.1 42.2,36.47 U1.5
NetR25_1: R25.1 U1.6 | length 23.7
  Bottom Layer w0.3: U1.6 39.66,33.6 38.995,34.265 38.995,38.569 40.859,40.433 46.217,40.433 R25.1
NetR26_1: R26.1 U1.12 | length 18.8
  Top Layer w0.3: R26.1 12.288,36.442 14.468,36.442 U1.12
OE: P2.6 R23.2 U2.6 U3.4 U4.16 | length 76.7
  Top Layer w0.3: U3.4 47.955,84.146 v1(49.419,84.146)
  Bottom Layer w0.3: U2.6 28.001,100.781 28.69,101.47 30.83,101.47 31.831,100.469 31.831,98.548 37.292,93.087 43.78,93.087 45.601,91.266 U3.4 ; R23.2 46.02,48.46 P2.6 ; U4.16 46.02,56.638 P2.6 ; v1(49.419,84.146) 49.419,57.839 P2.6
PAG: P2.1 R19.1 U3.13 U4.21 | length 69.2
  Top Layer w0.3: U3.13 29.108,80.133 46.218,80.133 46.853,79.498 46.853,76.958 48.454,75.358 57.052,75.358 U4.21
  Bottom Layer w0.3: U4.21 59.68,72.73 59.68,55.4 P2.1 58.72,51.511 59.13,51.101 R19.1
RDY: P2.7 R9.1 U2.3 U3.3 U4.15 | length 63.6
  Bottom Layer w0.3: U2.3 37.681,97.38 46.769,97.38 48.141,96.008 U3.3 46.879,85.238 46.879,60.109 U4.15 43.48,56.71 P2.7 43.48,48.54 R9.1
RX: P1.1 U1.2 | length 21.5
  Top Layer w0.3: U1.2 52.032,24.278 67.271,24.278 P1.1
TX: P1.2 U1.3 | length 20.7
  Top Layer w0.3: U1.3 48.548,27.758 65.674,27.758 P1.2
WR: P2.5 R25.2 U2.7 U3.5 U4.17 | length 93.2
  Top Layer w0.3: U2.7 24.211,100.69 22.198,100.69 21.657,100.148 21.657,95.576 24.171,93.062 24.171,90.928 25.949,89.15 27.676,89.15 29.073,87.753 29.073,84.578 30.232,83.419 39.98,83.419 U3.5 47.599,81.962 55.108,81.962 56.35,80.72 56.35,77.57 55.205,76.425 v1(51.984,76.425)
  Bottom Layer w0.3: R25.2 P2.5 50.7,56.58 U4.17 51.984,60.134 v1(51.984,76.425)
XA0: P2.3 R14.1 U2.9 U3.11 U4.19 | length 115.6
  Top Layer w0.3: U3.11 26.568,87.753 16.246,87.753 8.804,80.311 8.804,70.583 17.669,61.718 27.829,61.718 29.099,60.448 29.099,57.908 30.369,56.638 51.442,56.638 P2.3
  Bottom Layer w0.3: U2.9 24.194,95.627 26.694,95.627 29.251,93.07 29.251,90.74 27.821,89.31 U3.11 ; R14.1 53.64,48.32 P2.3 53.64,56.71 U4.19
XA1: P2.2 R16.1 U3.12 U4.20 | length 66.3
  Top Layer w0.3: U3.12 30.048,81.733 45.467,81.733 47.016,80.184 v1(54.473,80.184)
  Bottom Layer w0.3: v1(54.473,80.184) 57.039,77.618 57.039,60.131 U4.20 56.18,56.71 P2.2 56.18,48.41 R16.1
XTAL1: P2.8 R24.2 U2.5 U3.9 U4.13 | length 112.2
  Top Layer w0.3: U2.5 31.808,100.707 49.993,100.707 60.798,89.902 60.798,59.178 59.198,57.578 41.812,57.578 U4.13
  Bottom Layer w0.3: U2.5 30.541,98.28 31.817,97.004 31.817,87.584 U3.9 ; R24.2 40.54,51.177 40.94,51.577 P2.8 40.94,56.435 40.54,56.835 U4.13
pads on no net: U1.21 U2.2 U2.4 U3.2 U3.10 U3.20 U3.21 U3.22 U3.26 U3.27 U3.28 U4.12 U4.14 U4.22 U4.23 U4.24 U4.25 U4.26 U4.27 U4.28 U4.29 U4.30 U4.31 U4.32 U4.33 U4.34 U4.35 U4.36 U4.37 U4.38 U4.39

## Keep-outs
Keep-Out Layer:
  the board outline again, w0.5

## Other copper
Bottom Layer:
  text "Pawel Kisielewski" at 65.66,68.7 h2 r90
  text "Mohammad Sadr" at 69.48,65.72 h2 r90

## Dimensions
0,0 to 72.04,0 on Top Overlay
72.04,102.48 to 72.04,0 on Top Overlay

## Text inside footprints (layer, text, board x,y; h text height)
U5: Top Overlay "1" at 21.04,11.703 h0.7 r270; Top Overlay "2" at 21.04,6.979 h0.7 r270; Top Overlay "3" at 21.04,9.544 h0.7 r270